# Altium PCB Lab 1 - Test.PcbDoc
Units mm, origin at the board's own origin, x right, y up, seen from the top; angles counter-clockwise.
Board outline 75 x 75 mm, 2 copper layers (Top Layer, Bottom Layer); 11 components, 0 nets, 170 pads, 0 vias.
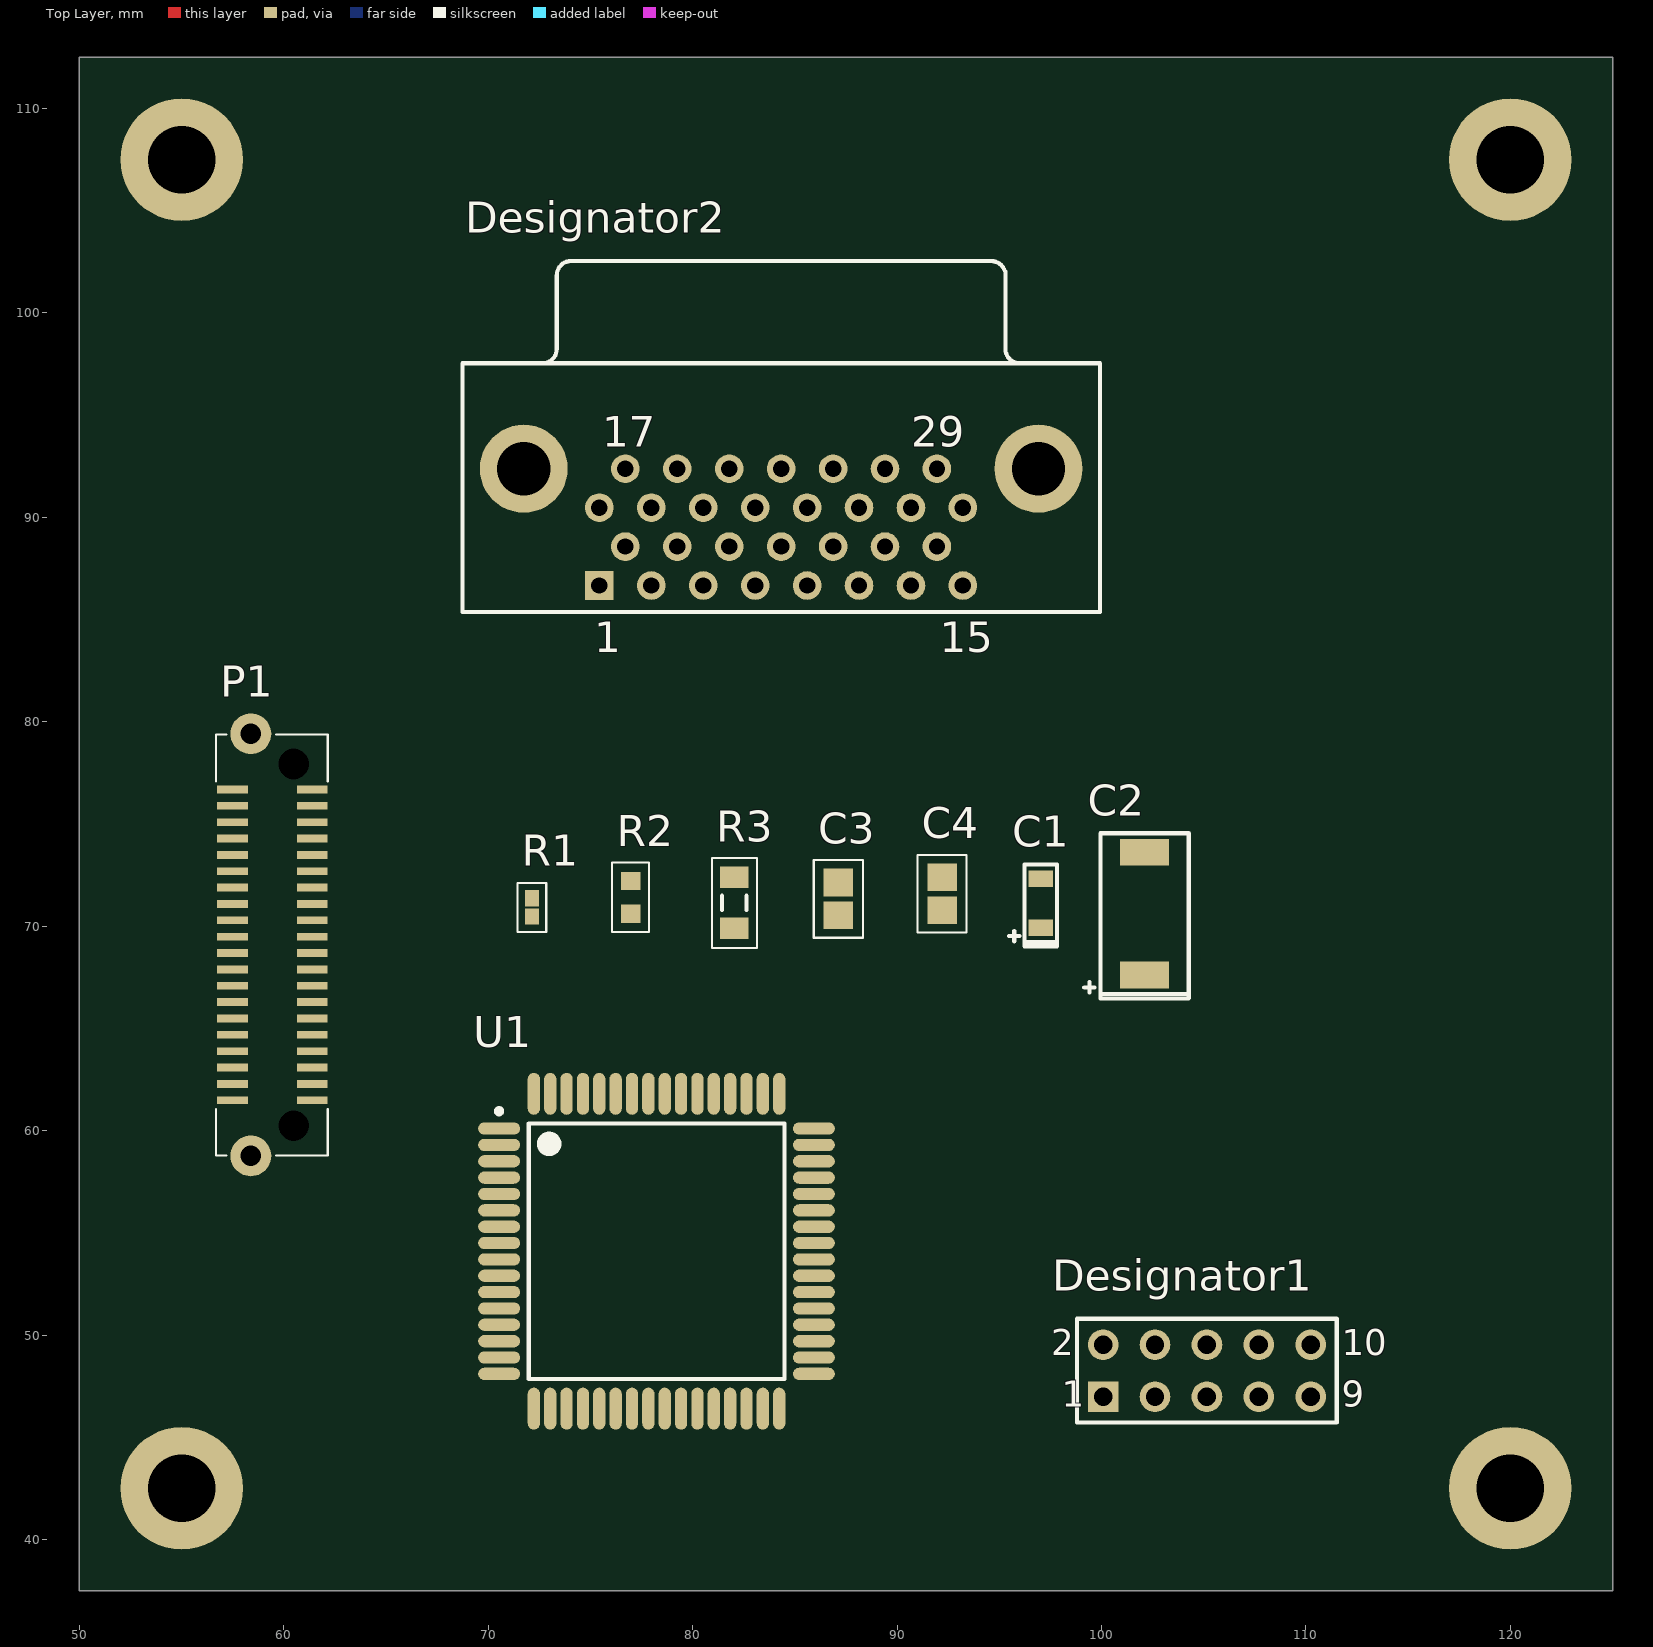
[diagram p0: Top Layer view]
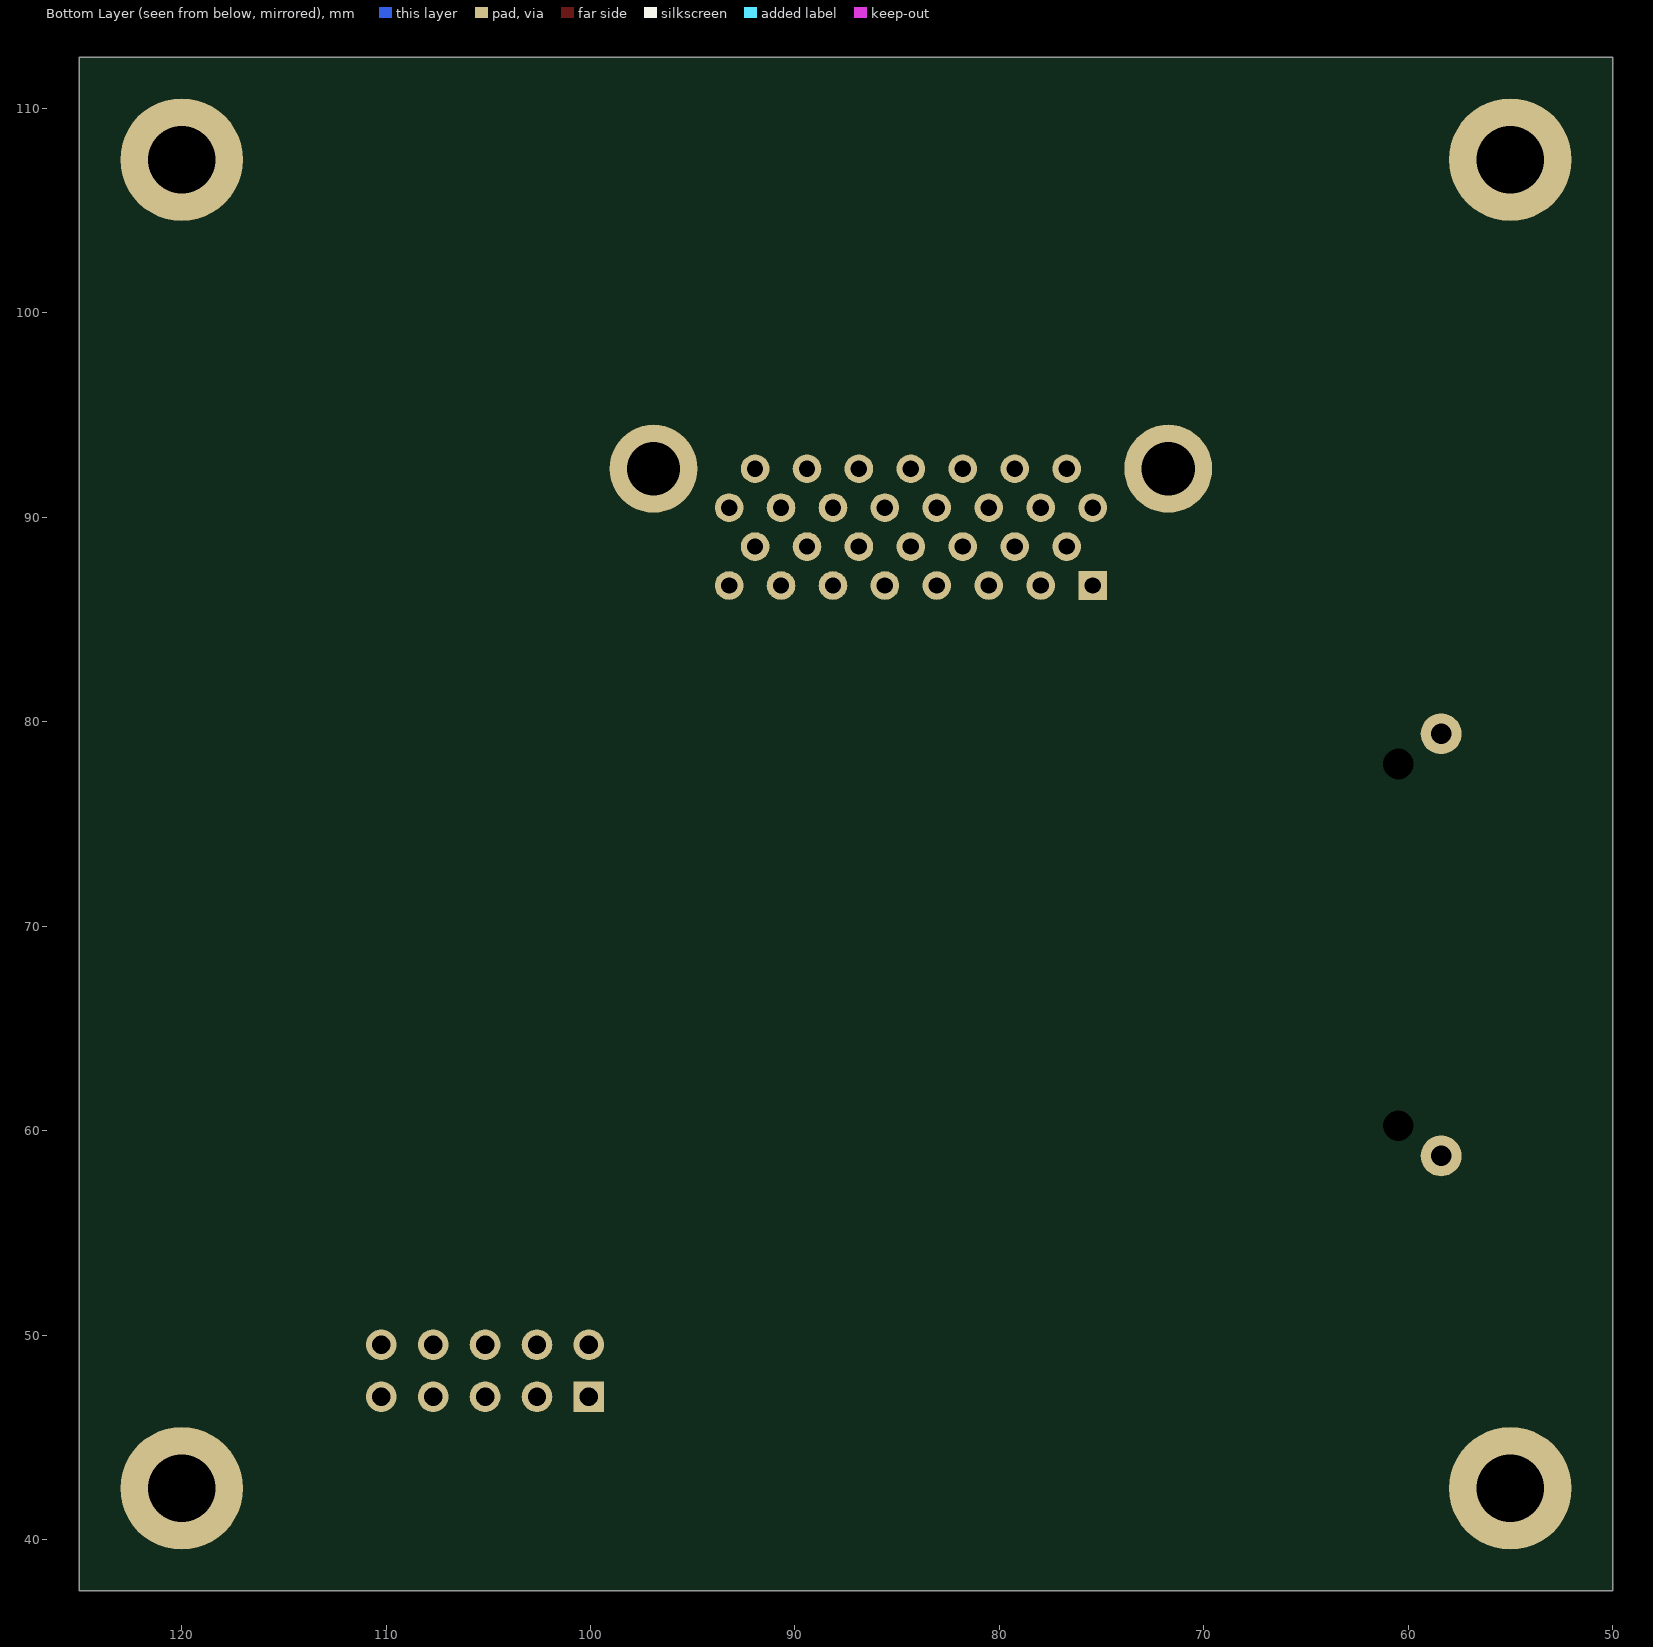
[diagram p1: Bottom Layer view, seen from below]

## Layer stack, top to bottom
Top Solder: solder mask 0.0102, Solder Resist, Dk 3.5
Top Layer: signal copper 0.0356
Dielectric 1: dielectric 0.32, FR-4, Dk 4.8
Bottom Layer: signal copper 0.0356
Bottom Solder: solder mask 0.0102, Solder Resist, Dk 3.5

## Board outline
50,37.5 50,112.5 125,112.5 125,37.5

## Design rules (kind name [scope] priority, off if disabled: settings)
Clearance [All] p1: gap=0.254 ignorepadtopadclearanceinfootprint=FALSE
PolygonConnect [All] p1: connectstyle=Relief reliefconductorwidth=0.254 reliefentries=4 polygonreliefangle="90 Angle" airgapwidth=0.254
RoutingVias [All] p1: holewidth=0.711 width=1.27 viastyle="Through Hole" minholewidth=0.711 minwidth=1.27 maxholewidth=0.711 maxwidth=1.27
SolderMaskExpansion [All] p1: expansion=0.102 istentingtop=FALSE
Width [All] p1: maxlimit=0.254 minlimit=0.254 preferedwidth=0.254
30 further rules are at their usual default settings.

## Classes and differential pairs
component class "Lab 1 - Test": C1 C2 C3 C4 P1 R1 R2 R3 U1

## Components (designator, comment, footprint, x,y, rotation, side; value= is the part's Value field where it differs from the comment)
C1 "10u" VJ_Tantalum_A 97.028,71.12 r90 top
C2 "100u" VJ_Tantalum_D 102.108,70.612 r90 top
C3 "100n" 0805_IPC 87.122,71.336 r90 top
C4 "1u" 0805_STD 92.202,71.59 r90 top
Designator1 "Comment" HDR2X5 100.076,46.99 r0 top
Designator2 "Comment" 050DSUB1.27-2H30 84.328,97.536 r0 top
P1 "SAMTEC LSEM 40-pin" LSEM-120-03.0-L-DV-A-N-K-TR 59.436,69.088 r90 top
R1 "1k" 0402 72.136,70.924 r90 top
R2 "10k" 0603 76.962,71.412 r90 top
R3 "100k" 1005 82.042,71.14 r90 top
U1 "ATmega128-16AU" 64A_M 78.232,54.102 r0 top

## Footprints (in the part's own frame and the unit in brackets; to place one, negate y for a bottom-side part, rotate by r counter-clockwise, add the part's x,y. Pads: shape width x height; smd on the part's side, far side on the other; paste and mask are expansions set on the pad)
050DSUB1.27-2H30 [mm] "Connector; D Subminiature; 30 Position; Right Angle; Pitch 1.27 mm"
  rect 1.4x1.4 hole 0.8: 1(-8.89,-10.87)
  round 1.4 hole 0.8: 2(-7.62,-8.965) 3(-6.35,-10.87) 4(-5.08,-8.965) 5(-3.81,-10.87) 6(-2.54,-8.965) 7(-1.27,-10.87) 8(0,-8.965) 9(1.27,-10.87) 10(2.54,-8.965) 11(3.81,-10.87) 12(5.08,-8.965) 13(6.35,-10.87) 14(7.62,-8.965) 15(8.89,-10.87) 16(-8.89,-7.06) 17(-7.62,-5.155) 18(-6.35,-7.06) 19(-5.08,-5.155) 20(-3.81,-7.06) 21(-2.54,-5.155) 22(-1.27,-7.06) 23(0,-5.155) 24(1.27,-7.06) 25(2.54,-5.155) 26(3.81,-7.06) 27(5.08,-5.155) 28(6.35,-7.06) 29(7.62,-5.155) 30(8.89,-7.06)
  round 4.3 hole 2.6: 31(-12.59,-5.155) 32(12.59,-5.155)
  silkscreen extent -15.59,-12.17 15.59,5
64A_M [mm] "Thin QFP, 64-Leads, Body 14x14mm, Pitch 0.8mm, IPC Low Density"
  oval 2.05x0.6 smd: 1(-7.7,6) 2(-7.7,5.2) 3(-7.7,4.4) 4(-7.7,3.6) 5(-7.7,2.8) 6(-7.7,2) 7(-7.7,1.2) 8(-7.7,0.4) 9(-7.7,-0.4) 10(-7.7,-1.2) 11(-7.7,-2) 12(-7.7,-2.8) 13(-7.7,-3.6) 14(-7.7,-4.4) 15(-7.7,-5.2) 16(-7.7,-6) 33(7.7,-6) 34(7.7,-5.2) 35(7.7,-4.4) 36(7.7,-3.6) 37(7.7,-2.8) 38(7.7,-2) 39(7.7,-1.2) 40(7.7,-0.4) 41(7.7,0.4) 42(7.7,1.2) 43(7.7,2) 44(7.7,2.8) 45(7.7,3.6) 46(7.7,4.4) 47(7.7,5.2) 48(7.7,6)
  oval 0.6x2.05 smd: 17(-6,-7.7) 18(-5.2,-7.7) 19(-4.4,-7.7) 20(-3.6,-7.7) 21(-2.8,-7.7) 22(-2,-7.7) 23(-1.2,-7.7) 24(-0.4,-7.7) 25(0.4,-7.7) 26(1.2,-7.7) 27(2,-7.7) 28(2.8,-7.7) 29(3.6,-7.7) 30(4.4,-7.7) 31(5.2,-7.7) 32(6,-7.7) 49(6,7.7) 50(5.2,7.7) 51(4.4,7.7) 52(3.6,7.7) 53(2.8,7.7) 54(2,7.7) 55(1.2,7.7) 56(0.4,7.7) 57(-0.4,7.7) 58(-1.2,7.7) 59(-2,7.7) 60(-2.8,7.7) 61(-3.6,7.7) 62(-4.4,7.7) 63(-5.2,7.7) 64(-6,7.7)
  silkscreen extent -7.82,-6.25 6.25,6.97, body extent -7,-7 7,7, height 1.6
0402 [mm]
  rect 0.8x0.7 smd: 1(-0.45,0) 2(0.45,0)
  silkscreen extent -1.2,-0.7 1.2,0.7, body extent -0.64,-0.35 0.64,0.35, height 0.84
0603 [mm] "Chip Resistor, 2-Leads, Body 1.63x0.81mm, IPC Medium Density"
  rect 0.9x0.95 smd: 1(-0.8,0) 2(0.8,0)
  silkscreen extent -1.7,-0.9 1.7,0.9, body extent -0.89,-0.47 0.89,0.47, height 0.51
0805_IPC [mm]
  rect 1.35x1.45 smd: 1(-0.8,0) 2(0.8,0)
  silkscreen extent -1.9,-1.2 1.9,1.2, body extent -1.1,-0.72 1.1,0.72, height 1.45
0805_STD [mm]
  rect 1.35x1.45 smd: 1(-0.8,0) 2(0.8,0)
  silkscreen extent -1.9,-1.2 1.9,1.2, body extent -1,-0.63 1,0.63, height 0.65
1005 [mm]
  rect 1.05x1.4 smd: 1(-1.25,0) 2(1.25,0)
  silkscreen extent -2.2,-1.1 2.2,1.1, body extent -1.43,-0.7 1.43,0.7, height 0.84
HDR2X5 [mm] "Connector; Header; 5x2 Position"
  rect 1.5x1.5 hole 0.9: 1(0,0)
  round 1.5 hole 0.9: 2(0,2.54) 3(2.54,0) 4(2.54,2.54) 5(5.08,0) 6(5.08,2.54) 7(7.62,0) 8(7.62,2.54) 9(10.16,0) 10(10.16,2.54)
  silkscreen extent -1.27,-1.27 11.43,3.81
LSEM-120-03.0-L-DV-A-N-K-TR [mm] "Samtec LSEM 40-pin"
  round 2 hole 1 paste-2539.97 mask+0: 0(-10.325,1.05) 0(10.325,1.05)
  round 2.1 on Top Solder: 0(-10.325,1.05) 0(10.325,1.05)
  round 0 hole 1.5: 0(-8.85,-1.05) 0(8.85,-1.05)
  rect 0.38x1.5 smd: 1(7.6,-1.95) 2(7.6,1.95) 3(6.8,-1.95) 4(6.8,1.95) 5(6,-1.95) 6(6,1.95) 7(5.2,-1.95) 8(5.2,1.95) 9(4.4,-1.95) 10(4.4,1.95) 11(3.6,-1.95) 12(3.6,1.95) 13(2.8,-1.95) 14(2.8,1.95) 15(2,-1.95) 16(2,1.95) 17(1.2,-1.95) 18(1.2,1.95) 19(0.4,-1.95) 20(0.4,1.95) 21(-0.4,-1.95) 22(-0.4,1.95) 23(-1.2,-1.95) 24(-1.2,1.95) 25(-2,-1.95) 26(-2,1.95) 27(-2.8,-1.95) 28(-2.8,1.95) 29(-3.6,-1.95) 30(-3.6,1.95) 31(-4.4,-1.95) 32(-4.4,1.95) 33(-5.2,-1.95) 34(-5.2,1.95) 35(-6,-1.95) 36(-6,1.95) 37(-6.8,-1.95) 38(-6.8,1.95) 39(-7.6,-1.95) 40(-7.6,1.95)
  silkscreen extent -10.31,-2.71 10.29,2.75, body extent -10.25,-2.75 10.25,2.75, height 4.58
VJ_Tantalum_A [mm]
  rect 0.8x1.2 smd: 1(1.2,0) 2(-1.2,0)
  silkscreen extent -2.1,-0.8 1.9,1.55, body extent -1.9,-0.8 1.9,0.8, height 1.6
VJ_Tantalum_D [mm]
  rect 1.3x2.4 smd: 1(3,0) 2(-3,0)
  silkscreen extent -4.14,-2.16 3.94,2.95, body extent -3.94,-2.16 3.94,2.16, height 2.8

## Part data
C1 C2: library part Capacitor_polarized
C3 C4: library part Capacitor
P1: library part LSEM-120-03.0-X-DV-A-N-K, Manufacturer=SAMTEC, Part Number=LSEM-120-03.0-X-DV-A-N-K
R1 R2 R3: library part Resistor
U1: library part CMP-0095-00259-2, "8-bit AVR Microcontroller, 4.5-5.5V, 128KB Flash, 4KB EEPROM, 4KB SRAM, 64-pin TQFP, Industrial Grade (-40°C to 85°C)", Code_JEDEC=MS-026-AEB, ComponentLink1Description="Manufacturer URL", ComponentLink1URL=http://www.atmel.com/, ComponentLink2Description="ATmega128(L) Datasheet", ComponentLink2URL=http://www.atmel.com/dyn/resources/prod_documents/doc2467.pdf, ComponentLink3Description="ATmega128(L) Summary", ComponentLink3URL=http://www.atmel.com/dyn/resources/prod_documents/2467S.pdf, DatasheetVersion="revX, Jun-2011", PackageDescription="64-Pin Plastic Thin Profile Quad Flat Pack, 14 x 14 x 1.0 mm Body, 0.8 mm Pitch (TQFP)", PackageReference=64A, PackageVersion="revC, Oct-2010", RevisionNote="PackageVersion updated. URLs added."

## Free pads (board coordinates)
  round 6 hole 3.3: 3(55,42.5) 3(55,107.5) 3(120,42.5) 3(120,107.5)

## Nets (pads, with @x,y where several pads share a name; then routed paths per layer and width w, separated by ;. In a path a pad name is that pad's centre, name@x,y a point inside that pad or via, vN(x,y) a via of type N, cw(c..) or ccw(c..) an arc to the next point about the centre after c; other vN are vias at no path point)
pads on no net: C1.1 C1.2 C2.1 C2.2 C3.1 C3.2 C4.1 C4.2 Designator1.1 Designator1.2 Designator1.3 Designator1.4 Designator1.5 Designator1.6 Designator1.7 Designator1.8 Designator1.9 Designator1.10 Designator2.1 Designator2.2 Designator2.3 Designator2.4 Designator2.5 Designator2.6 Designator2.7 Designator2.8 Designator2.9 Designator2.10 Designator2.11 Designator2.12 Designator2.13 Designator2.14 Designator2.15 Designator2.16 Designator2.17 Designator2.18 Designator2.19 Designator2.20 Designator2.21 Designator2.22 Designator2.23 Designator2.24 Designator2.25 Designator2.26 Designator2.27 Designator2.28 Designator2.29 Designator2.30 Designator2.31 Designator2.32 P1.0 P1.1 P1.2 P1.3 P1.4 P1.5 P1.6 P1.7 P1.8 P1.9 P1.10 P1.11 P1.12 P1.13 P1.14 P1.15 P1.16 P1.17 P1.18 P1.19 P1.20 P1.21 P1.22 P1.23 P1.24 P1.25 P1.26 P1.27 P1.28 P1.29 P1.30 P1.31 P1.32 P1.33 P1.34 P1.35 P1.36 P1.37 P1.38 P1.39 P1.40 R1.1 R1.2 R2.1 R2.2 R3.1 R3.2 U1.1 U1.2 U1.3 U1.4 U1.5 U1.6 U1.7 U1.8 U1.9 U1.10 U1.11 U1.12 U1.13 U1.14 U1.15 U1.16 U1.17 U1.18 U1.19 U1.20 U1.21 U1.22 U1.23 U1.24 U1.25 U1.26 U1.27 U1.28 U1.29 U1.30 U1.31 U1.32 U1.33 U1.34 U1.35 U1.36 U1.37 U1.38 U1.39 U1.40 U1.41 U1.42 U1.43 U1.44 U1.45 U1.46 U1.47 U1.48 U1.49 U1.50 U1.51 U1.52 U1.53 U1.54 U1.55 U1.56 U1.57 U1.58 U1.59 U1.60 U1.61 U1.62 U1.63 U1.64

## Dimensions
55,107.5 to 120,107.5 on Mechanical 5 (Mech5)
125,37.5 to 50,37.5 on Mechanical 5 (Mech5)
125,37.5 to 125,112.5 on Mechanical 5 (Mech5)

## Text inside footprints (layer, text, board x,y; h text height)
Designator1: Top Overlay "10" at 111.76,49.022 h1.27; Top Overlay "9" at 111.76,46.482 h1.27; Top Overlay "1" at 98.044,46.482 h1.27; Top Overlay "2" at 97.536,49.022 h1.27
Designator2: Top Overlay "15" at 92.093,83.391 h1.5; Top Overlay "1" at 75.188,83.391 h1.5; Top Overlay "29" at 90.698,93.456 h1.5; Top Overlay "17" at 75.583,93.456 h1.5